# EAGLE board ecu2 (EAGLE 9.0.0)
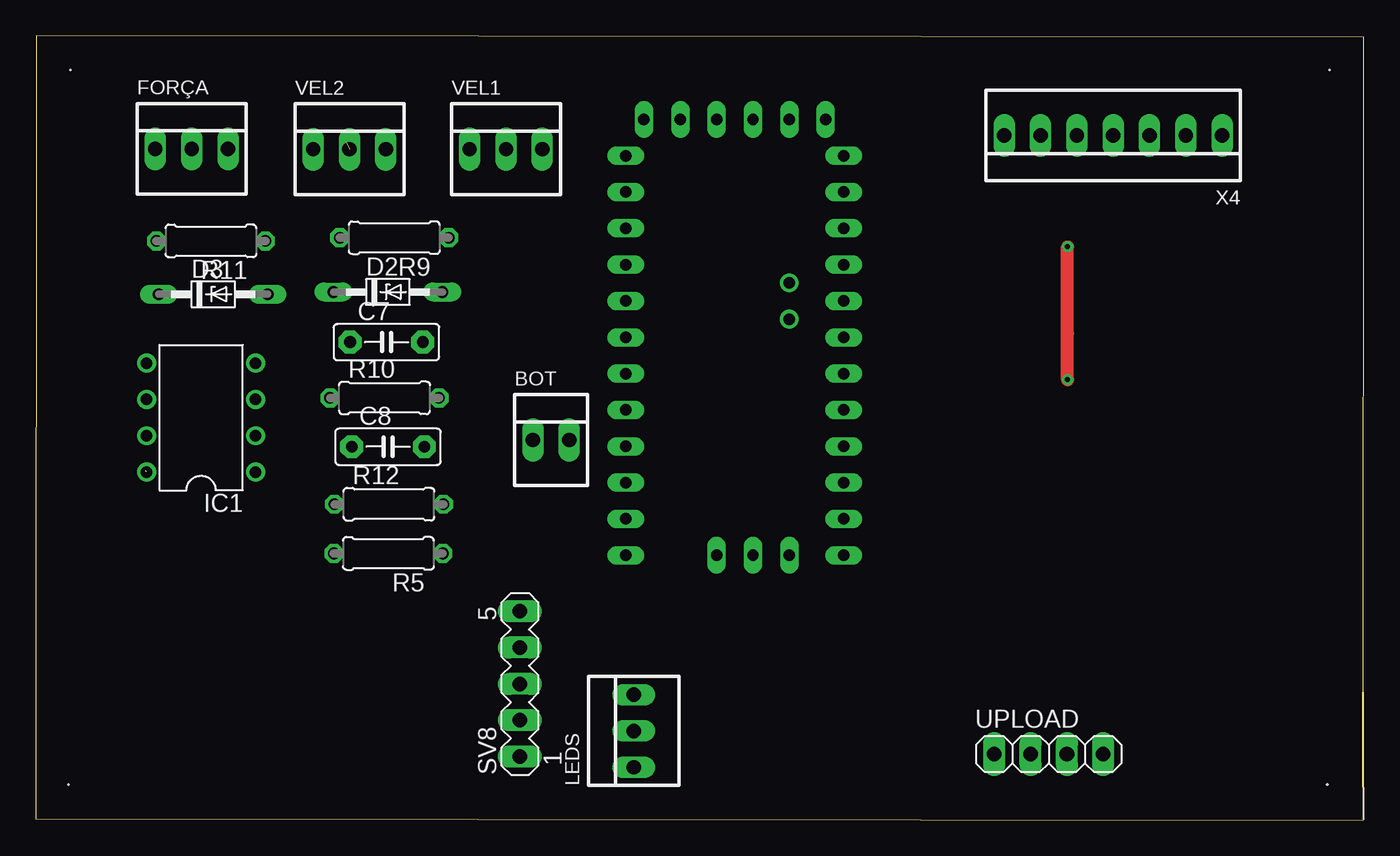
[diagram p0: board, top side]
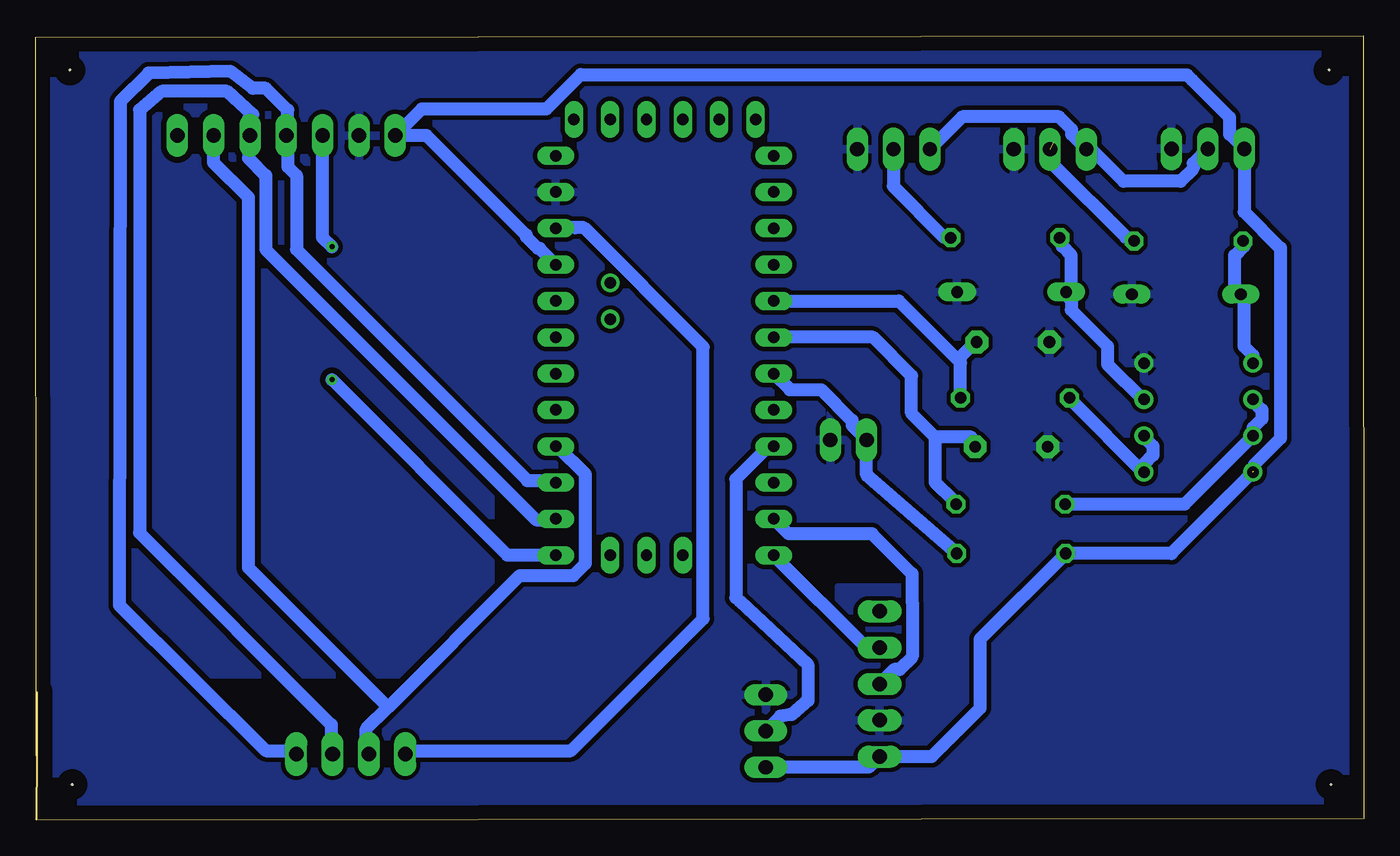
[diagram p1: board, bottom side, seen from below]

Size 92.85 x 54.85 mm. Coordinates in mm from the lower left corner, seen from the top.
Outline: 92.81,0 0,0.1 0.04,54.85 92.85,54.76 92.81,4.5
Outline: 92.79,8.96 92.79,4.53 92.82,0.07
Copper layers (1*16): Top 0.035mm / dielectric 1.5mm / Bottom 0.035mm
Design rules "default *": minimum track width 36mil, minimum drill 0.35mm, track to track 12mil, track to pad 12mil, pad to pad 12mil, via to via 12mil, smd to smd 12mil, copper to edge 40mil, drill to drill 6mil, minimum pad ring 10mil, minimum via ring 8mil, stop-mask expansion 4mil, vias tented up to drill 0mil, thermal gap 10mil
Net classes: 1 ALIMENTACAO: width 0.635 mm
Holes 0.08 mm at 2.44,52.45 2.29,2.48 90.3,2.48 90.46,52.45

## Footprints (pad centres in the part's own frame; a part is rotated, then mirrored left to right if it is on the bottom)
22-23-2021 = drill 1 long: 1 -1.27,0; 2 1.27,0
C5B2.5 = drill 0.813 pad 1.6 octagon: 1 -2.54,0; 2 2.54,0
DO34Z7 = drill 0.813 long: A 3.81,0; C -3.81,0
22-23-2031 = drill 1 long: 1 -2.54,0; 2 0,0; 3 2.54,0
DIL08 = drill 0.813 pad 1.27: 1 -3.81,-3.81; 2 -1.27,-3.81; 3 1.27,-3.81; 4 3.81,-3.81; 5 3.81,3.81; 6 1.27,3.81; 7 -1.27,3.81; 8 -3.81,3.81
0207/7 = drill 0.813 octagon: 1 -3.81,0; 2 3.81,0
MA05-1 = drill 1.016 long: 1 -5.08,0; 2 -2.54,0; 3 0,0; 4 2.54,0; 5 5.08,0
ABK-PRO-MINI = drill 0.8 long: A0 10.16,-3.81; A1 10.16,-6.35; A2 10.16,-8.89; A3 10.16,-11.43; A6 3.81,-21.59; A7 6.35,-21.59; D2 -5.08,-3.81; D3 -5.08,-6.35; D4 -5.08,-8.89; D5 -5.08,-11.43; D6 -5.08,-13.97; D7 -5.08,-16.51; D8 -5.08,-19.05; D9 -5.08,-21.59; D10 10.16,-21.59; D11 10.16,-19.05; D12 10.16,-16.51; D13 10.16,-13.97; DTR 8.89,8.89; GND 10.16,3.81; GND1 -5.08,-1.27; GND2 -3.81,8.89; GND3 -1.27,8.89; GND4 1.27,-21.59; RAW 10.16,6.35; RST 10.16,1.27; RST1 -5.08,1.27; RX1 -5.08,3.81; RX1-1 3.81,8.89; TX0 -5.08,6.35; TX0-1 6.35,8.89; VCC 10.16,-1.27; VCC1 1.27,8.89 | drill 0.8: A4 6.35,-5.08; A5 6.35,-2.54
1X04 = drill 1.016 long: 1 -3.81,0; 2 -1.27,0; 3 1.27,0; 4 3.81,0
22-23-2071 = drill 1 long: 1 -7.62,0; 2 -5.08,0; 3 -2.54,0; 4 0,0; 5 2.54,0; 6 5.08,0; 7 7.62,0

## Placement (x,y rotation side)
BOT  RPM  [22-23-2021]  36.03,26.58 0 top
C7  100nF  [C5B2.5]  24.52,33.43 0 top
C8  100nF  [C5B2.5]  24.63,26.11 0 top
D2  5.0V  [DO34Z7]  24.62,36.93 0 top
D3  5.0V  [DO34Z7]  12.41,36.77 0 top
FORÇA  FORÇA  [22-23-2031]  10.9,46.94 0 top
IC1  LM358N  [DIL08]  11.56,28.15 90 top
LEDS  FORÇA  [22-23-2031]  41.81,6.23 90 top
R5  10k  [0207/7]  24.65,18.65 180 top
R9  4.7KR  [0207/7]  25.06,40.73 180 top
R10  1k  [0207/7]  24.39,29.53 0 top
R11  4.7KR  [0207/7]  12.25,40.5 180 top
R12  1k  [0207/7]  24.69,22.09 0 top
SV8  [MA05-1]  33.85,9.52 90 top
U$1  ABK-PRO-MINI  [ABK-PRO-MINI]  46.34,40.11 0 top
UPLOAD  [1X04]  70.83,4.62 0 top
VEL1  COMB 1  [22-23-2031]  32.88,46.92 0 top
VEL2  COMB 2  [22-23-2031]  21.94,46.92 0 top
X4  MODULE CAN  [22-23-2071]  75.34,47.88 180 top

## Library data of the parts
BOT = con-molex; MF: MOLEX; MPN: 22-23-2021; OC_FARNELL: 1462926; OC_NEWARK: 25C3832
C7 C8 = capacitor-wima
D2 D3 = diode
FORÇA LEDS VEL1 VEL2 = con-molex; MF: MOLEX; MPN: 22-23-2031; OC_FARNELL: 1462950; OC_NEWARK: 30C0862
IC1 = linear
R5 R9-R12 = resistor
SV8 = con-lstb; OC_FARNELL: unknown; OC_NEWARK: unknown
U$1 = Arduino-clone
UPLOAD = pinhead
X4 = con-molex; MF: MOLEX; MPN: 22-23-2071; OC_FARNELL: 1654534; OC_NEWARK: 56H0445

## Nets
+5V [ALIMENTACAO]: FORÇA.1 IC1.8 LEDS.1 R5.2 SV8.1 U$1.VCC X4.7
+12V [ALIMENTACAO]: FORÇA.2 VEL1.1 VEL2.1
BOT_DISPLAY: BOT.1 R5.1 U$1.D4
GND [ALIMENTACAO]: BOT.2 C7.1 C8.1 D2.A D3.A FORÇA.3 IC1.4 LEDS.3 SV8.2 U$1.GND VEL1.3 VEL2.3 X4.6
LEDS: LEDS.2 U$1.D6
MISO: U$1.D12 UPLOAD.4 X4.4
MOSI: U$1.D11 UPLOAD.3 X4.3
N$5: D2.C IC1.3 R9.2
N$12: IC1.1 IC1.2 R10.1
N$13: D3.C IC1.5 R11.2
N$14: IC1.6 IC1.7 R12.1
RST: U$1.RST UPLOAD.1
RX: SV8.4 U$1.D9
SCK: U$1.D13 UPLOAD.2 X4.2
SS: U$1.D10 X4.5
TX: SV8.3 U$1.D8
VEL1_IN [ALIMENTACAO]: R9.1 VEL1.2
VEL1_OUT: C7.2 R10.2 U$1.D2
VEL2_IN [ALIMENTACAO]: R11.1 VEL2.2
VEL2_OUT: C8.2 R12.2 U$1.D3

## Tracks (layer width: path | path; a pad name or v marks a point on that pad's centre or on a via)
+5V  (1 unrouted)
  Bottom 0.914: 8.41,46.6 FORÇA.1 | FORÇA.1 8.36,42.54 5.82,40 5.82,26.69 7.68,24.83 7.68,24.42 | 56.38,38.84 U$1.VCC 57.62,39.97 57.74,39.97 58.57,40.8 58.57,40.91 65.53,47.88 X4.7 65.87,49.73 57.16,49.73 54.75,52.14 54.71,52.11 12.34,52.11 | FORÇA.1 9.38,47.97 9.38,49.14 11.99,51.75 12.34,52.11 | 12.34,52.11 12.35,52.11 | LEDS.1 34.6,3.69 SV8.1 30.22,4.44 26.84,7.83 26.84,12.66 R5.2 13.44,18.65 IC1.8
+12V
  Bottom 0.914: FORÇA.2 11.92,45.92 11.92,45.56 12.81,44.67 16.8,44.67 19.04,46.92 VEL2.1 20.42,47.94 20.42,48.3 21.31,49.19 28.08,49.19 VEL1.1
BOT_DISPLAY
  Bottom 0.914: R5.1 34.76,24.14 BOT.1 35.78,27.6 35.78,27.96 37.92,30.1 40.13,30.1 U$1.D4
GND
  pour Bottom (isolate 0.254): 0.32,54.49 92.56,54.49 92.72,0.52 64.95,0.52 64.79,0.62 21.07,0.62 21.06,0.77 0.31,0.77
LEDS
  Bottom 0.914: LEDS.2 40.78,7.26 39.99,7.38 38.86,8.36 38.86,10.87 43.65,15.31 43.9,15.57 43.9,23.85 41.61,26.14 U$1.D6
MISO
  Bottom 0.914: 56.68,23.58 U$1.D12 56.95,23.74 58.47,23.74 74.63,39.9 74.63,45.08 75.24,45.69 75.24,47.82 X4.4 75.24,48.13 75.24,49.65 76.76,51.18 77.68,51.18 79.24,52.36 84.97,52.24 86.94,50.26 87.01,15.03 76.76,4.85 74.93,4.85 UPLOAD.4
MODULE_CAN
  pour Bottom (isolate 0.406): 61.06,10.2 88.84,10.2 88.84,51 61.06,51
MOSI
  Bottom 0.914: U$1.D11 56.64,21 57.86,21 76.76,39.9 76.76,45.08 77.98,46.3 77.98,47.82 X4.3 77.98,48.13 77.98,49.04 77.68,49.35 79.47,50.96 84.05,50.96 85.6,49.65 85.6,20.09 72.19,6.67 72.19,4.85 UPLOAD.3
N$1
  pour Bottom: 36.79,2.64 5.93,2.64 5.93,16.36 36.79,16.36
N$5
  Bottom 0.914: IC1.3 15.37,29.33 17.91,31.87 17.91,33.14 20.45,35.68 20.45,36.32 D2.C 20.45,36.95 20.45,39.49 21.08,40.13 R9.2
N$12
  Bottom 0.914: IC1.2 15.37,26.79 14.73,26.16 14.73,25.52 15.37,24.89 IC1.1 15.37,24.25 20.45,29.33 R10.1
N$13
  Bottom 0.914: IC1.5 7.75,32.51 8.38,33.14 8.38,36.32 D3.C 9.02,36.95 9.02,39.49 8.38,40.13 R11.2
N$14
  Bottom 0.914: IC1.7 7.75,27.43 7.11,28.06 7.11,28.7 7.75,29.33 IC1.6 | 7.75,26.79 IC1.7 | IC1.7 12.54,22.09 R12.1
RST
  Bottom 0.914: U$1.RST 56.34,41.42 55.12,41.42 54.53,41.42 46.19,33.08 46.19,14.08 55.43,4.85 67.01,4.85 UPLOAD.1
RX
  Bottom 0.914: SV8.4 34.8,12.06 U$1.D9
SCK
  Bottom 0.914: 68.23,7.89 69.75,6.37 69.75,4.85 UPLOAD.2 | U$1.D13 56.34,26.18 56.34,26.1 54.43,24.19 54.43,17.94 55.26,17.11 59.01,17.11 68.23,7.89 | 68.23,7.89 77.98,17.65 77.98,43.56 80.42,45.99 80.42,47.82 X4.2
SS  (via drill 0.35)
  Top 0.914: v72.15,30.79 72.15,34.05 v72.15,40.1
  Bottom 0.914: U$1.D10 59.88,18.52 v72.15,30.79 | v72.15,40.1 72.8,40.75 X4.5
TX
  Bottom 0.914: U$1.D8 40.21,20.02 34.38,20.02 31.58,17.23 31.58,15.25 31.57,15.23 31.57,11.43 32.46,10.54 32.84,10.54 SV8.3
VEL1_IN
  Bottom 0.914: R9.1 29.34,40.76 32.89,44.35 32.89,47.52 VEL1.2
VEL1_OUT
  Bottom 0.914: 40.77,36.32 U$1.D2 32.5,36.3 28.2,32 | C7.2 27.43,33.14 28.2,32.38 28.2,32 | R10.2 28.2,32
VEL2_IN  (1 unrouted)
  Bottom 0.914: 21.69,47.4 21.72,45.84 16.64,40.76 R11.1
VEL2_OUT
  Bottom 0.914: 29.97,26.79 27.43,26.79 27.43,26.16 C8.2 | 40.77,33.78 41.15,33.77 | 41.15,33.77 U$1.D3 | 29.97,26.79 29.97,23.62 28.7,22.35 R12.2 | 29.97,26.79 31.62,28.44 31.62,31.07 34.32,33.77 41.15,33.77